# EAGLE board PCB (EAGLE 9.7.0)
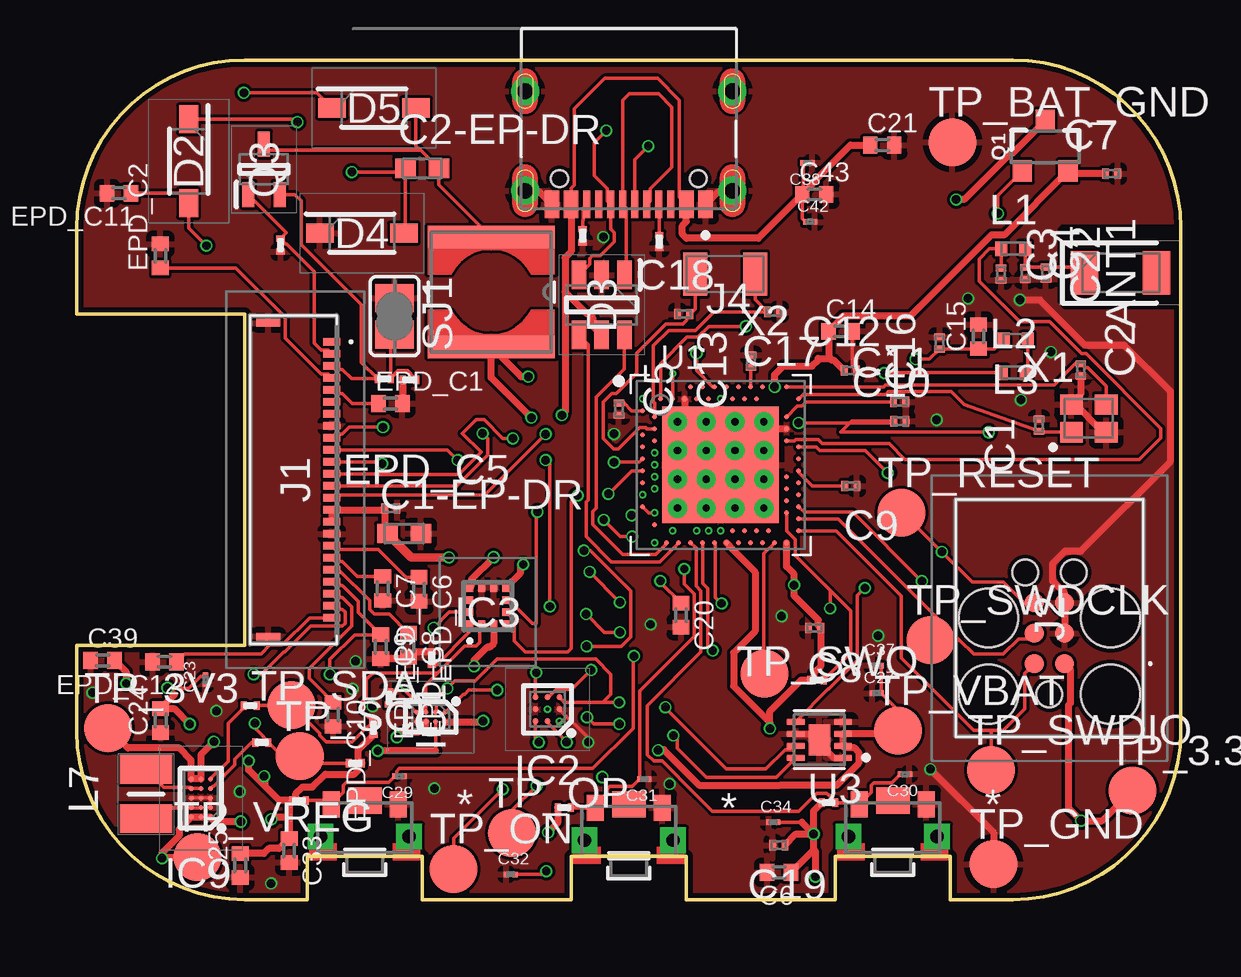
[diagram p0: board, top side]
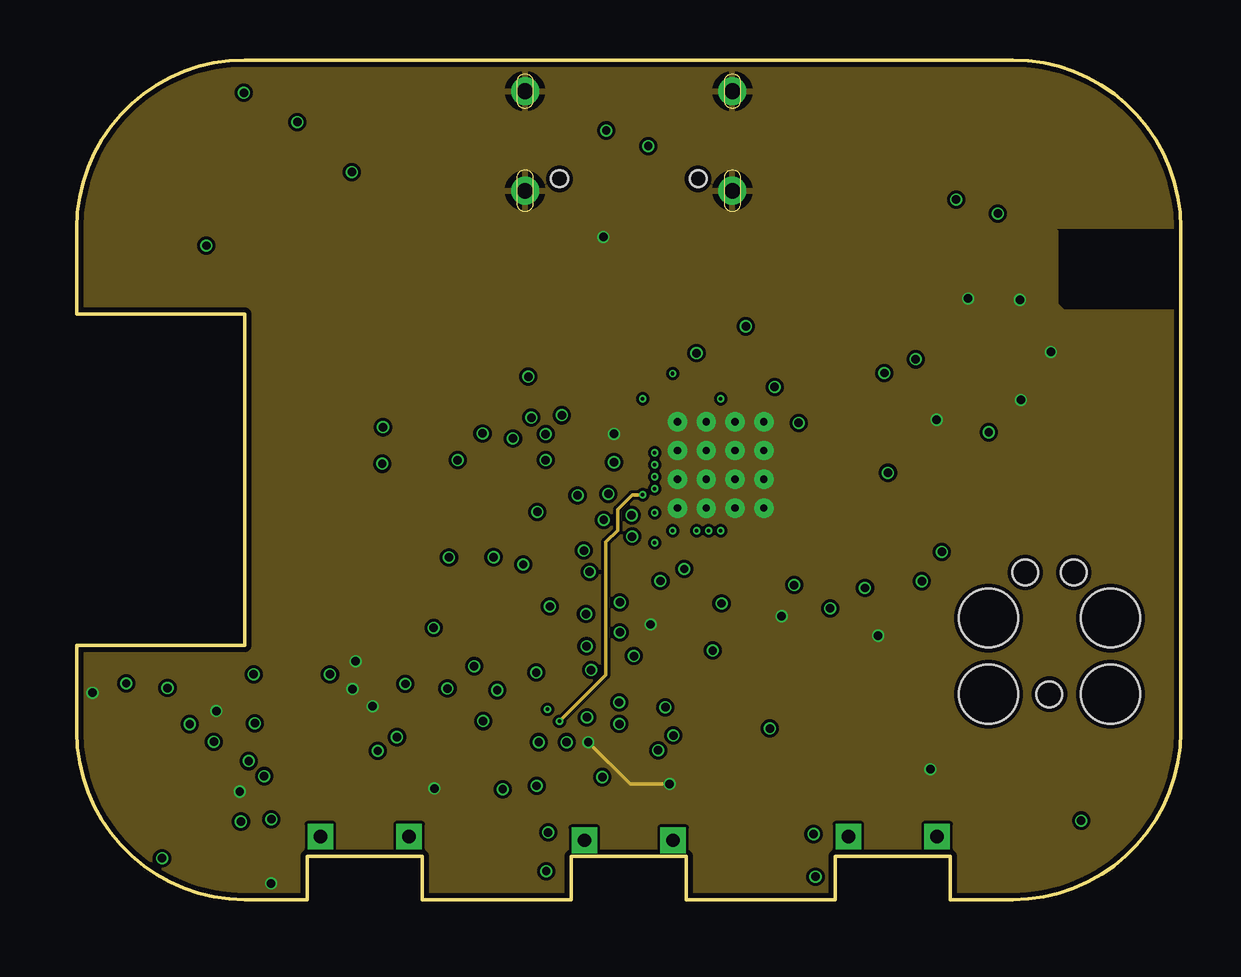
[diagram p1: board, inner layer Route2]
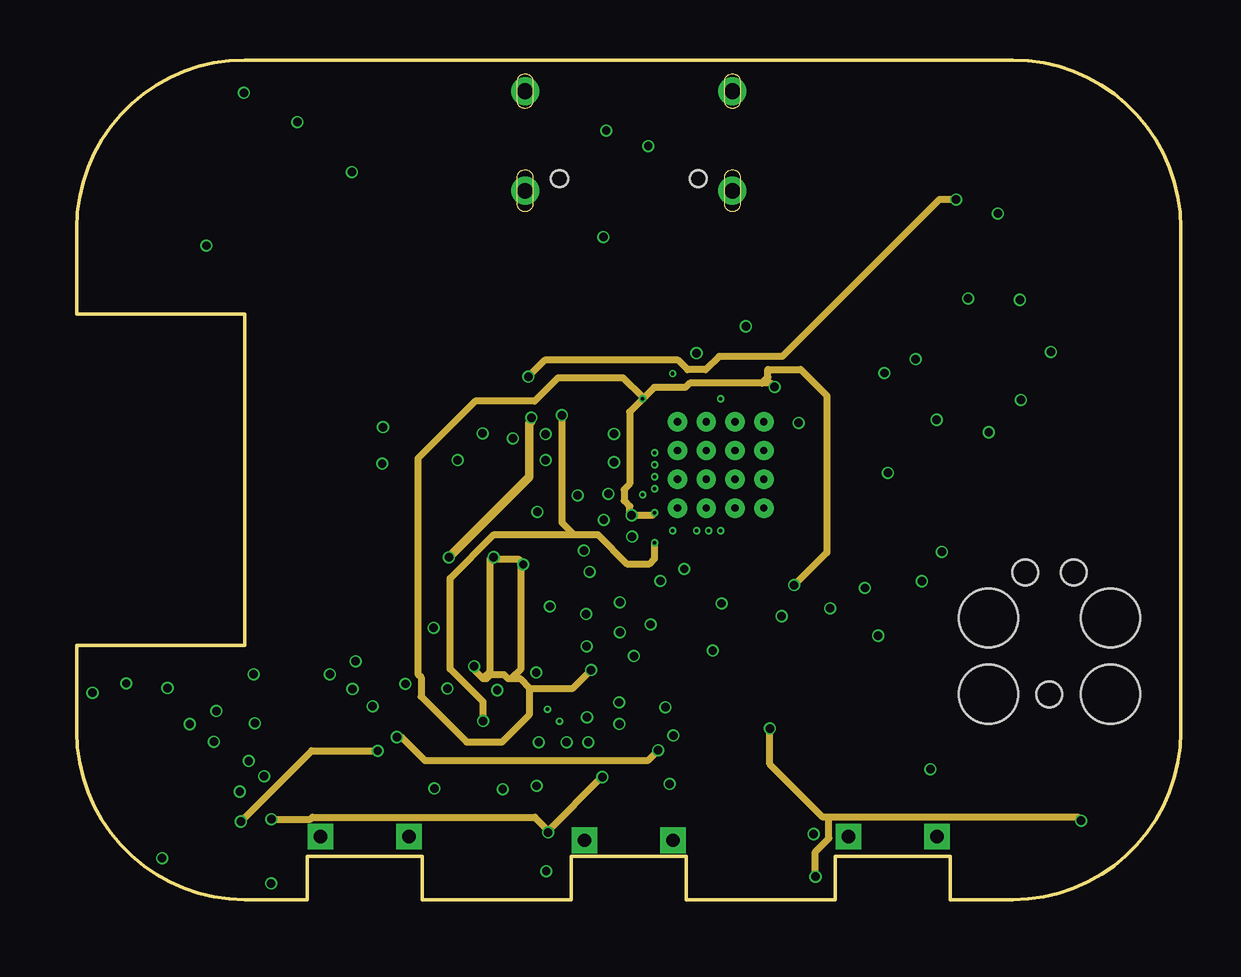
[diagram p2: board, inner layer Route15]
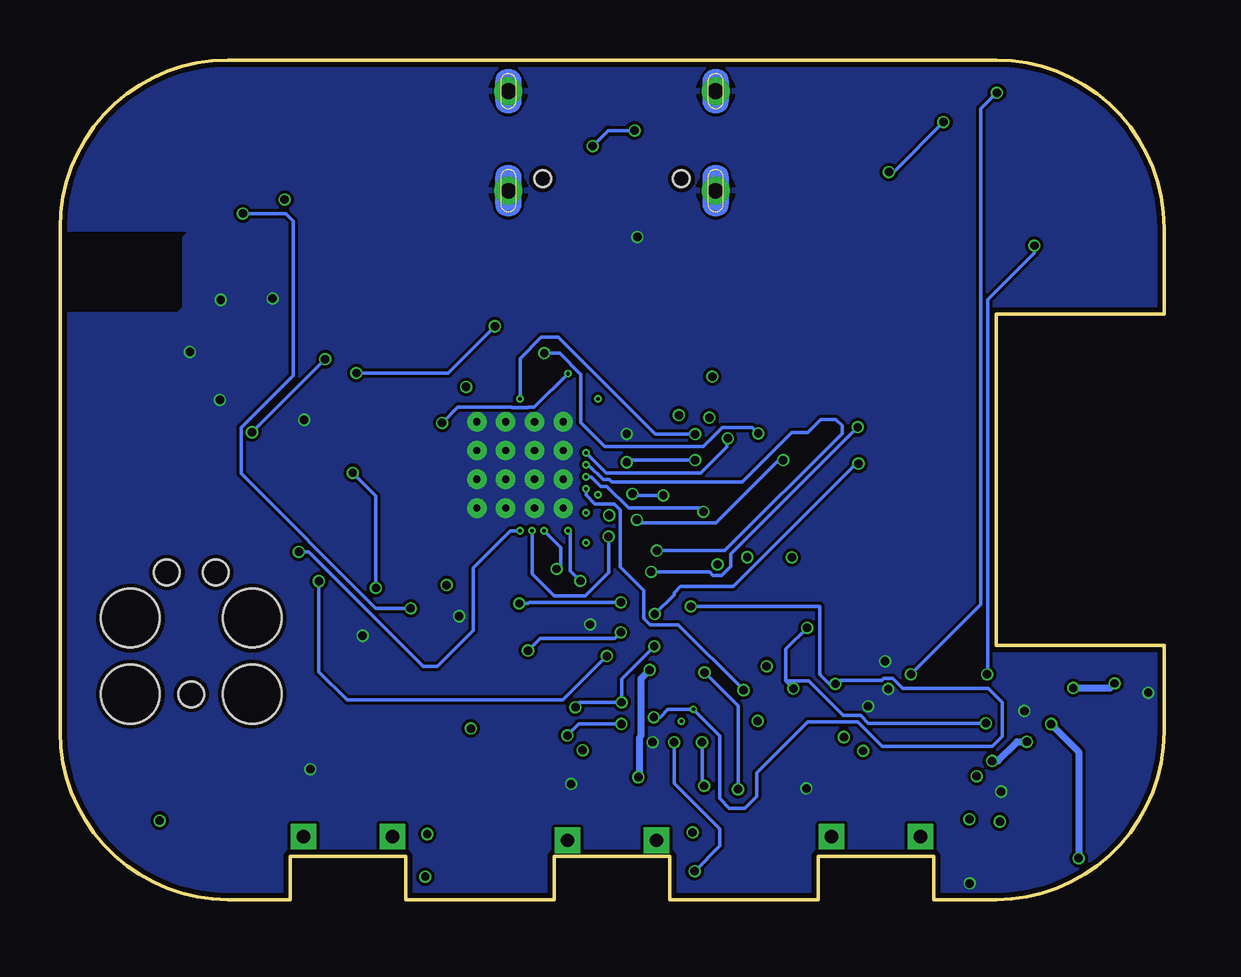
[diagram p3: board, bottom side, seen from below]

Size 46 x 35 mm. Coordinates in mm from the lower left corner, seen from the top.
Outline: 7,35 39,35 arc-90 46,28 46,7 arc-90 39,0 36.4,0 36.4,1.8 31.6,1.8 31.6,0 25.4,0 25.4,1.8 20.6,1.8 20.6,0 14.4,0 14.4,1.8 9.6,1.8 9.6,0 7,0 arc-90 0,7 0,10.6 7,10.6 7,24.4 0,24.4 0,28 arc-90 7,35
Copper layers (1+2*15+16): Top 0.035mm / dielectric 1.6mm / Route2 0.035mm / dielectric 0.15mm / Route15 0.035mm / dielectric 0.2mm / Bottom 0.035mm
Design rules "jlcpcb-2layers.dru *": minimum track width 5mil, minimum drill 0.3mm, track to track 5mil, track to pad 5mil, pad to pad 5mil, via to via 5mil, smd to smd 5mil, copper to edge 0.2mm, drill to drill 6mil, minimum pad ring 10mil, minimum via ring 3mil, stop-mask expansion 4mil, vias tented up to drill 0mil, thermal gap 10mil

## Footprints (pad centres in the part's own frame; a part is rotated, then mirrored left to right if it is on the bottom)
2450AT18B100E_ANTC3216X140N = smd 1.15 x 1.8: 1 -1.5,0; 2 1.5,0
NORDIC_NRF_3_RESC0201_L = smd 0.28 x 0.43: 1 -0.255,0; 2 0.255,0
NORDIC_NRF_3_RESC0603_L = smd 0.85 x 0.8: 1 -0.7,0; 2 0.7,0
PERFECT_0402_0402 = smd 0.6 x 0.7: 1 -0.5,0; 2 0.5,0
GRM011R60J152KE01L_2_CAPC0201X13N = smd 0.22 x 0.23: 1 -0.185,0; 2 0.185,0
ESP32_C6_LIBRARY_5_SOD3716X135N = smd 1.15 x 0.8: 1 -1.75,0; 2 1.75,0
ESP32_C6_LIBRARY_3_SOT95P280X145-6N = smd 1.2 x 0.6: 1 -1.25,0.95; 2 -1.25,0; 3 -1.25,-0.95; 4 1.25,-0.95; 5 1.25,0; 6 1.25,0.95
BQ25180YBGR_BGA8C40P2X4_100X155X50 = smd 0.2 x 0.2: A1 -0.2,0.6; A2 0.2,0.6; B1 -0.2,0.2; B2 0.2,0.2; C1 -0.2,-0.2; C2 0.2,-0.2; D1 -0.2,-0.6; D2 0.2,-0.6
DRV2605YZFR_BGA9C50P3X3_144X144X62 = smd 0.25 x 0.25: A1 -0.5,0.5; A2 0,0.5; A3 0.5,0.5; B1 -0.5,0; B2 0,0; B3 0.5,0; C1 -0.5,-0.5; C2 0,-0.5; C3 0.5,-0.5
BMA423_BMA423 = smd 0.3 x 0.35: 1 -0.75,-0.775; 2 -0.25,-0.775; 3 0.25,-0.775; 4 0.75,-0.775; 7 0.75,0.775; 8 0.25,0.775; 9 -0.25,0.775; 10 -0.75,0.775 | smd 0.35 x 0.3: 5 0.775,-0.25; 6 0.775,0.25; 11 -0.775,0.25; 12 -0.775,-0.25
RT6160AWSC_BGA15C40P3X5_140X230X60 = smd 0.216 x 0.216: A1 -0.4,0.8; A2 0,0.8; A3 0.4,0.8; B1 -0.4,0.4; B2 0,0.4; B3 0.4,0.4; C1 -0.4,0; C2 0,0; C3 0.4,0; D1 -0.4,-0.4; D2 0,-0.4; D3 0.4,-0.4; E1 -0.4,-0.8; E2 0,-0.8; E3 0.4,-0.8
503480-2400_5034802400 = smd 0.3 x 0.7: 1 -5.75,1.525; 2 -5.25,1.525; 3 -4.75,1.525; 4 -4.25,1.525; 5 -3.75,1.525; 6 -3.25,1.525; 7 -2.75,1.525; 8 -2.25,1.525; 9 -1.75,1.525; 10 -1.25,1.525; 11 -0.75,1.525; 12 -0.25,1.525; 13 0.25,1.525; 14 0.75,1.525; 15 1.25,1.525; 16 1.75,1.525; 17 2.25,1.525; 18 2.75,1.525; 19 3.25,1.525; 20 3.75,1.525; 21 4.25,1.525; 22 4.75,1.525; 23 5.25,1.525; 24 5.75,1.525 | smd 0.3 x 1: MP1 -6.54,-1.125; MP2 6.54,-1.125
TC2030-IDC_TC2030IDC = smd 0.783 x 0.783: 1 -0.953,-0.635; 2 -0.953,0.635; 3 0.317,-0.635; 4 0.317,0.635; 5 1.588,-0.635; 6 1.588,0.635 | hole 2.451: -2.223,-2.54; -2.223,2.54; 0.952,-2.54; 0.952,2.54 | hole 1.067: -2.223,0; 2.857,-1.016; 2.857,1.016
KH-TYPE-C-16P_KINGHELM_KH-TYPE-C-16P = smd 0.6 x 1.15: A1_B12 -3.2,4.725; A4_B9 -2.4,4.725; A9_B4 2.4,4.725; A12_B1 3.2,4.725 | smd 0.3 x 1.15: A5 -1.25,4.725; A6 -0.25,4.725; A7 0.25,4.725; A8 1.25,4.725; B5 1.75,4.725; B6 0.75,4.725; B7 -0.75,4.725; B8 -1.75,4.725 | drill 0.65 pad 1.05: SH1 -4.32,0; SH2 4.32,0; SH3 -4.32,4.15; SH4 4.32,4.15 | hole 0.7: -2.89,3.65; 2.89,3.65
NORDIC_NRF_2_RESC0402_L = smd 0.5 x 0.6: 1 -0.5,0; 2 0.5,0
ESP32_C6_LIBRARY_2_IND_4828-WE-TPC_WRE = smd 0.9 x 5.3: 1 -2.286,0; 2 2.286,0
MLP2016SR47MT0S1_INDC2016X100N = smd 1.2 x 2.2: 1 -1.028,0; 2 1.028,0
ESP32_C6_LIBRARY_4_ESP32_C6_LIBRARY_4_ESP32_C6_LIBRARY_4_ESP32_C6_LIBRARY_4_ESP32_WROVER_SPARKFUN-DISCRETESEMI_SOT23-3 = smd 0.8 x 0.9: 1 -0.95,-1; 2 0.95,-1; 3 0,1.1
ESP32_C6_LIBRARY_6_SOT65P210X110-3N = smd 1.05 x 0.5: 1 -1.05,0.65; 2 -1.05,-0.65; 3 1.05,0
CPF0201D7K68C1_0201 = smd 0.35 x 0.25: 1 0,0.275; 2 0,-0.275
ESP32_C6_LIBRARY_7_JUMPER_SJ = smd 1.168 x 1.6: 1 -0.762,0; 2 0.762,0
2025-10-22_07-23-44_LIBRARY_SW_EVP-AKE31A_PAN = smd 0.711 x 1.092: 1 -1.4,-0.972; 2 1.4,-0.972 | drill 0.559 pad 0.914 square: 3 -1.848,0.381; 4 1.848,0.381 | smd 1.397 x 1.092: 5 0,-1.124
HECTOR_WATCH_1_TP20R = smd 2 x 2: TP 0,0
NORDIC_NRF_4_AQFN50P700X700X85_HS-74N = smd 4.85 x 4.85: P$74 0,0 | drill 0.3 pad 0.6: P$75 -1.8,1.8; P$76 -0.6,1.8; P$77 0.6,1.8; P$78 1.8,1.8; P$79 -1.8,0.6; P$80 -0.6,0.6; P$81 0.6,0.6; P$82 1.8,0.6; P$83 -1.8,-0.6; P$84 -0.6,-0.6; P$85 0.6,-0.6; P$86 1.8,-0.6; P$87 -1.8,-1.8; P$88 -0.6,-1.8; P$89 0.6,-1.8; P$90 1.8,-1.8 | smd 0.2 x 0.2: P$A8 -1.25,3.25; P$A10 -0.75,3.25; P$A12 -0.25,3.25; P$A14 0.25,3.25; P$A16 0.75,3.25; P$A18 1.25,3.25; P$A20 1.75,3.25; P$A22 2.25,3.25; P$A23 2.75,3.25; P$AA24 3.25,-2.25; P$AB2 -2.75,-2.5; P$AC5 -2,-2.75; P$AC9 -1,-2.75; P$AC11 -0.5,-2.75; P$AC13 0,-2.75; P$AC15 0.5,-2.75; P$AC17 1,-2.75; P$AC19 1.5,-2.75; P$AC21 2,-2.75; P$AC24 3.25,-2.75; P$AD2 -2.75,-3.25; P$AD4 -2.25,-3.25; P$AD6 -1.75,-3.25; P$AD8 -1.25,-3.25; P$AD10 -0.75,-3.25; P$AD12 -0.25,-3.25; P$AD14 0.25,-3.25; P$AD16 0.75,-3.25; P$AD18 1.25,-3.25; P$AD20 1.75,-3.25; P$AD22 2.25,-3.25; P$AD23 2.75,-3.25; P$B1 -3.25,2.75; P$B3 -2.5,2.75; P$B5 -2,2.75; P$B7 -1.5,2.75; P$B9 -1,2.75; P$B11 -0.5,2.75; P$B13 0,2.75; P$B15 0.5,2.75; P$B17 1,2.75; P$B19 1.5,2.75; P$B24 3.25,2.75; P$C1 -3.25,2.25; P$D2 -2.75,2; P$D23 2.75,2; P$E24 3.25,1.75; P$F2 -2.75,1.5; P$F23 2.75,1.5; P$G1 -3.25,1.25; P$H2 -2.75,1; P$H23 2.75,1; P$J1 -3.25,0.75; P$J24 3.25,0.75; P$K2 -2.75,0.5; P$L1 -3.25,0.25; P$L24 3.25,0.25; P$M2 -2.75,0; P$N1 -3.25,-0.25; P$N24 3.25,-0.25; P$P2 -2.75,-0.5; P$P23 2.75,-0.5; P$R1 -3.25,-0.75; P$R24 3.25,-0.75; P$T2 -2.75,-1; P$T23 2.75,-1; P$U1 -3.25,-1.25; P$U24 3.25,-1.25; P$V23 2.75,-1.5; P$W1 -3.25,-1.75; P$W24 3.25,-1.75; P$Y2 -2.75,-2; P$Y23 2.75,-2
ESP32_C6_LIBRARY_SON50P200X200X80-9N = smd 0.76 x 0.27: 1 -0.985,0.75; 2 -0.985,0.25; 3 -0.985,-0.25; 4 -0.985,-0.75; 5 0.985,-0.75; 6 0.985,-0.25; 7 0.985,0.25; 8 0.985,0.75 | smd 0.9 x 1.3: 9 0,0
NORDIC_NRF_BT-XTAL_2016_N = smd 0.95 x 0.85: 1 -0.725,-0.575; 2 0.725,-0.575; 3 0.725,0.575; 4 -0.725,0.575
NORDIC_NRF_1_XTAL_3215_N = smd 1 x 1.8: 1 -1.25,0; 2 1.25,0

## Placement (x,y rotation side)
ANT1  2450AT18B100E  [2450AT18B100E_ANTC3216X140N]  43.49,26.12 0 top
C1  12pF  [NORDIC_NRF_3_RESC0201_L]  40.09,19.78 90 top
C1-EP-DR  10uF  [NORDIC_NRF_3_RESC0603_L]  13.64,15.26 0 top
C2  12pF  [NORDIC_NRF_3_RESC0201_L]  41.83,22.08 270 top
C2-EP-DR  4.7uF/25V  [NORDIC_NRF_3_RESC0603_L]  14.39,30.48 0 top
C3  1pF  [NORDIC_NRF_3_RESC0201_L]  38.51,26.07 270 top
C4  1pF  [NORDIC_NRF_3_RESC0201_L]  39.52,26.1 270 top
C5  100nF  [NORDIC_NRF_3_RESC0201_L]  22.59,20.44 270 top
C6  4.7µF  [PERFECT_0402_0402]  29.26,1.13 180 top
C7  100nF  [NORDIC_NRF_3_RESC0201_L]  43.12,30.26 0 top
C8  100nF  [NORDIC_NRF_3_RESC0201_L]  30.74,11.32 180 top
C9  820pF  [NORDIC_NRF_3_RESC0201_L]  32.25,17.24 180 top
C10  N.C  [NORDIC_NRF_3_RESC0201_L]  34.3,19.94 0 top
C11  100pF  [NORDIC_NRF_3_RESC0201_L]  34.29,20.75 0 top
C12  100nF  [NORDIC_NRF_3_RESC0201_L]  32.23,22.05 0 top
C13  N.C  [NORDIC_NRF_3_RESC0201_L]  28.09,22.44 90 top
C14  4.7µF  [PERFECT_0402_0402]  31.83,23.69 0 top
C15  1.0µF  [PERFECT_0402_0402]  37.57,23.47 90 top
C16  47nF  [NORDIC_NRF_3_RESC0201_L]  35.95,23.2 90 top
C17  12pF  [NORDIC_NRF_3_RESC0201_L]  29.03,24.5 180 top
C18  12pF  [NORDIC_NRF_3_RESC0201_L]  25.29,24.41 0 top
C19  100nF  [NORDIC_NRF_3_RESC0201_L]  29.25,2.27 180 top
C20  4.7µF  [PERFECT_0402_0402]  25.18,11.86 270 top
C21  4.7µF  [PERFECT_0402_0402]  33.56,31.45 0 top
C22  N.C  [NORDIC_NRF_3_RESC0201_L]  40.38,26.11 270 top
C23  0.1uF  [GRM011R60J152KE01L_2_CAPC0201X13N]  5.36,9.17 90 top
C24  10uF  [PERFECT_0402_0402]  3.49,7.46 90 top
C25  22uF  [PERFECT_0402_0402]  6.81,1.42 90 top
C27  0.1uF  [GRM011R60J152KE01L_2_CAPC0201X13N]  33.33,8.6 0 top
C29  1uF  [GRM011R60J152KE01L_2_CAPC0201X13N]  13.45,5.15 180 top
C30  1uF  [GRM011R60J152KE01L_2_CAPC0201X13N]  34.51,5.23 180 top
C31  1uF  [GRM011R60J152KE01L_2_CAPC0201X13N]  23.64,5.03 180 top
C32  1uF  [GRM011R60J152KE01L_2_CAPC0201X13N]  18.08,1.05 0 top
C33  22uF  [PERFECT_0402_0402]  8.85,2.05 270 top
C34  0.1uF  [GRM011R60J152KE01L_2_CAPC0201X13N]  29.02,3.22 0 top
C37  1uF  [GRM011R60J152KE01L_2_CAPC0201X13N]  33.33,9.76 0 top
C38  1uF  [GRM011R60J152KE01L_2_CAPC0201X13N]  30.45,30.71 180 top
C39  10uF  [PERFECT_0402_0402]  1.08,9.97 0 top
C42  0.1uF  [GRM011R60J152KE01L_2_CAPC0201X13N]  30.56,28.25 0 top
C43  4.7uF  [PERFECT_0402_0402]  30.73,29.4 0 top
D2  MBR0530  [ESP32_C6_LIBRARY_5_SOD3716X135N]  4.66,30.78 270 top
D3  USBLC6-2SC6Y  [ESP32_C6_LIBRARY_3_SOT95P280X145-6N]  21.87,24.79 270 top
D4  MBR0530  [ESP32_C6_LIBRARY_5_SOD3716X135N]  11.88,27.78 0 top
D5  MBR0530  [ESP32_C6_LIBRARY_5_SOD3716X135N]  12.38,33 0 top
EPD_C1  1uF/50V  [PERFECT_0402_0402]  13.07,20.68 0 top
EPD_C2  1uF/50V  [PERFECT_0402_0402]  3.48,26.83 90 top
EPD_C5  0.1uF/50V  [NORDIC_NRF_3_RESC0201_L]  13.09,16.3 0 top
EPD_C6  1uF/50V  [PERFECT_0402_0402]  14.26,12.93 270 top
EPD_C7  1uF/50V  [PERFECT_0402_0402]  12.75,12.97 270 top
EPD_C8  1uF/50V  [PERFECT_0402_0402]  13.82,10.6 270 top
EPD_C9  1uF/50V  [PERFECT_0402_0402]  12.67,10.54 270 top
EPD_C10  1uF/50V  [PERFECT_0402_0402]  10.68,7.72 270 top
EPD_C11  1uF/50V  [PERFECT_0402_0402]  1.76,29.44 180 top
EPD_C12  1uF/50V  [PERFECT_0402_0402]  3.66,9.91 180 top
IC1  BQ25180YBGR  [BQ25180YBGR_BGA8C40P2X4_100X155X50]  14.75,7.61 270 top
IC2  DRV2605YZFR  [DRV2605YZFR_BGA9C50P3X3_144X144X62]  19.61,7.93 180 top
IC3  BMA421  [BMA423_BMA423]  17.13,12.23 0 top
IC9  RT6160AWSC  [RT6160AWSC_BGA15C40P3X5_140X230X60]  5.17,4.23 180 top
J1  503480-2400  [503480-2400_5034802400]  9.1,17.5 270 top
J2  TC2030-IDC  [TC2030-IDC_TC2030IDC]  40.53,10.78 90 top
J4  KH-TYPE-C-16P  [KH-TYPE-C-16P_KINGHELM_KH-TYPE-C-16P]  23,33.7 180 top
L1  3.9nH  [NORDIC_NRF_2_RESC0402_L]  39.02,27.13 0 top
L2  10µH  [NORDIC_NRF_2_RESC0402_L]  39.04,21.96 0 top
L3  15nH  [NORDIC_NRF_2_RESC0402_L]  39.12,23.33 180 top
L5  68uH  [ESP32_C6_LIBRARY_2_IND_4828-WE-TPC_WRE]  17.27,25.33 270 top
L7  FTC252012SR47MBCA  [MLP2016SR47MT0S1_INDC2016X100N]  2.88,4.4 90 top
Q1  20V/4.2A/52mΩ/1.4W  [ESP32_C6_LIBRARY_4_ESP32_C6_LIBRARY_4_ESP32_C6_LIBRARY_4_ESP32_C6_LIBRARY_4_ESP32_WROVER_SPARKFUN-DISCRETESEMI_SOT23-3]  40.35,31.37 0 top
Q3  SI1308EDL-T1-GE3  [ESP32_C6_LIBRARY_6_SOT65P210X110-3N]  7.8,30.44 90 top
R1_EP_DR  0.47  [CPF0201D7K68C1_0201]  12.81,21.71 270 top
R1_USB  5K1  [CPF0201D7K68C1_0201]  24.27,27.43 180 top
R2  0  [CPF0201D7K68C1_0201]  7.23,8.09 270 top
R2_EP_DR  10K  [CPF0201D7K68C1_0201]  8.49,27.28 180 top
R2_USB  5K1  [CPF0201D7K68C1_0201]  21.08,27.67 0 top
R3  0  [CPF0201D7K68C1_0201]  14.79,10.06 0 top
R4  0  [CPF0201D7K68C1_0201]  7.71,6.55 270 top
R5  10K  [CPF0201D7K68C1_0201]  31.32,4.04 270 top
R7  10K  [CPF0201D7K68C1_0201]  9.26,4.13 270 top
R8  10K  [CPF0201D7K68C1_0201]  20.31,3.84 270 top
R9  10K  [CPF0201D7K68C1_0201]  13.01,8.41 0 top
R17  3K3  [CPF0201D7K68C1_0201]  11.6,5.68 270 top
R18  3K3  [CPF0201D7K68C1_0201]  12.37,7.15 180 top
R_PWR_EPD  10K  [CPF0201D7K68C1_0201]  30.84,9.15 270 top
R_TYPE_SEL  2.2  [CPF0201D7K68C1_0201]  13.86,21.67 90 top
SJ1  [ESP32_C6_LIBRARY_7_JUMPER_SJ]  13.24,24.32 270 top
SW_DN  2025-10-22_07-23-44_LIBRARY_EVP-AKE31ASW_EVP-AKE31A_PAN  [2025-10-22_07-23-44_LIBRARY_SW_EVP-AKE31A_PAN]  12,3 180 top
SW_ENT  2025-10-22_07-23-44_LIBRARY_EVP-AKE31ASW_EVP-AKE31A_PAN  [2025-10-22_07-23-44_LIBRARY_SW_EVP-AKE31A_PAN]  23,2.85 180 top
SW_UP  2025-10-22_07-23-44_LIBRARY_EVP-AKE31ASW_EVP-AKE31A_PAN  [2025-10-22_07-23-44_LIBRARY_SW_EVP-AKE31A_PAN]  34,3 180 top
TP_3.3V  HECTOR_WATCH_1_TPTP20R  [HECTOR_WATCH_1_TP20R]  43.98,4.54 0 top
TP_3V3  HECTOR_WATCH_1_TPTP20R  [HECTOR_WATCH_1_TP20R]  1.3,7.14 0 top
TP_BAT_GND  HECTOR_WATCH_1_TPTP20R  [HECTOR_WATCH_1_TP20R]  36.48,31.57 0 top
TP_GND  HECTOR_WATCH_1_TPTP20R  [HECTOR_WATCH_1_TP20R]  38.2,1.47 0 top
TP_ON  HECTOR_WATCH_1_TPTP20R  [HECTOR_WATCH_1_TP20R]  15.7,1.28 0 top
TP_OP  HECTOR_WATCH_1_TPTP20R  [HECTOR_WATCH_1_TP20R]  18.13,2.77 0 top
TP_RESET  HECTOR_WATCH_1_TPTP20R  [HECTOR_WATCH_1_TP20R]  34.36,16.12 0 top
TP_SCL  HECTOR_WATCH_1_TPTP20R  [HECTOR_WATCH_1_TP20R]  9.29,5.97 0 top
TP_SDA  HECTOR_WATCH_1_TPTP20R  [HECTOR_WATCH_1_TP20R]  8.95,8.1 0 top
TP_SWDCLK  HECTOR_WATCH_1_TPTP20R  [HECTOR_WATCH_1_TP20R]  35.56,10.81 0 top
TP_SWDIO  HECTOR_WATCH_1_TPTP20R  [HECTOR_WATCH_1_TP20R]  38.1,5.39 0 top
TP_SWO  HECTOR_WATCH_1_TPTP20R  [HECTOR_WATCH_1_TP20R]  28.65,9.42 0 top
TP_VBAT  HECTOR_WATCH_1_TPTP20R  [HECTOR_WATCH_1_TP20R]  34.22,7.04 0 top
TP_VREG  HECTOR_WATCH_1_TPTP20R  [HECTOR_WATCH_1_TP20R]  5.04,1.76 0 top
U1  NRF52840_QF  [NORDIC_NRF_4_AQFN50P700X700X85_HS-74N]  26.83,18.12 0 top
U3  MAX17048G+T10  [ESP32_C6_LIBRARY_SON50P200X200X80-9N]  30.94,6.66 180 top
X1  32MHz  [NORDIC_NRF_BT-XTAL_2016_N]  42.17,20.06 0 top
X2  32.768kHz  [NORDIC_NRF_1_XTAL_3215_N]  27.01,26.07 180 top

## Library data of the parts
ANT1 = proiect; ARROW_PART_NUMBER: 2450AT18B100E; ARROW_PRICE-STOCK: https://www.arrow.com/en/products/2450at18b100e/johanson-dielectrics?utm_currency=USD&region=nac; DESCRIPTION: Antennas 2.45GHz ANTENNA; HEIGHT: 1.4mm; MANUFACTURER_NAME: JOHANSON TECHNOLOGY; MANUFACTURER_PART_NUMBER: 2450AT18B100E; MOUSER_PART_NUMBER: 609-2450AT18B100E; MOUSER_PRICE-STOCK: https://www.mouser.co.uk/ProductDetail/Johanson-Technology/2450AT18B100E?qs=yCnrNFeXz%252Bh5MFsFIXGZGA%3D%3D
C1 C1-EP-DR C2 C2-EP-DR C3-C22 C24 C25 C33 C39 C43 EPD_C1 EPD_C2 EPD_C5-EPD_C12 L1-L3 R1_EP_DR R1_USB R2 R2_EP_DR R2_USB R3-R5 R7-R9 R17 R18 R_PWR_EPD R_TYPE_SEL SJ1 TP_3.3V TP_3V3 TP_BAT_GND TP_GND TP_ON TP_OP TP_RESET TP_SCL TP_SDA TP_SWDCLK TP_SWDIO TP_SWO TP_VBAT TP_VREG U1 X1 X2 = proiect
C23 C27 C29-C32 C34 C37 C38 C42 = proiect; AVAILABILITY: In Stock; CHECK_PRICES: https://www.snapeda.com/parts/GRM011R60J152KE01L/Murata/view-part/?ref=eda; DESCRIPTION: SMD Capacitor X5R(EIA) with Capacitance: 1500pF Tol. 10%. Rated Voltage: 6.3Vdc; MF: Murata; MP: GRM011R60J152KE01L; PACKAGE: 0201 Murata; PRICE: None; SNAPEDA_LINK: https://www.snapeda.com/parts/GRM011R60J152KE01L/Murata/view-part/?ref=snap
D2 D4 D5 = proiect; AVAILABILITY: In Stock; CHECK_PRICES: https://www.snapeda.com/parts/MBR0530/Onsemi/view-part/?ref=eda; DESCRIPTION: Diode Schottky 30 V 500mA Surface Mount SOD-123; MF: ON Semiconductor; MP: MBR0530; PACKAGE: SOD-123-2 ON Semiconductor; PRICE: None; PURCHASE-URL: https://www.snapeda.com/api/url_track_click_mouser/?unipart_id=179458&manufacturer=ON Semiconductor&part_name=MBR0530&search_term=None; SNAPEDA_LINK: https://www.snapeda.com/parts/MBR0530/Onsemi/view-part/?ref=snap
D3 = proiect; AVAILABILITY: In Stock; CHECK_PRICES: https://www.snapeda.com/parts/USBLC6-2SC6Y/STMicroelectronics/view-part/?ref=eda; DESCRIPTION: 17V Clamp 5A (8/20µs) Ipp Tvs Diode Surface Mount SOT-23-6; MF: STMicroelectronics; MP: USBLC6-2SC6Y; PACKAGE: SOT-23-6 STMicroelectronics; PRICE: None; SNAPEDA_LINK: https://www.snapeda.com/parts/USBLC6-2SC6Y/STMicroelectronics/view-part/?ref=snap
IC1 = proiect; ARROW_PART_NUMBER: BQ25180YBGR; ARROW_PRICE-STOCK: https://www.arrow.com/en/products/bq25180ybgr/texas-instruments?utm_currency=USD&region=nac; DESCRIPTION: Charger IC Lithium Ion/Polymer, Lithium Iron Phosphate 8-DSBGA (1.6x1.1); HEIGHT: 0.5mm; MANUFACTURER_NAME: Texas Instruments; MANUFACTURER_PART_NUMBER: BQ25180YBGR; MOUSER_PART_NUMBER: 595-BQ25180YBGR; MOUSER_PRICE-STOCK: https://www.mouser.co.uk/ProductDetail/Texas-Instruments/BQ25180YBGR?qs=doiCPypUmgEWjAK%252BJAX6Tw%3D%3D
IC2 = proiect; ARROW_PART_NUMBER: DRV2605YZFR; ARROW_PRICE-STOCK: https://www.arrow.com/en/products/drv2605yzfr/texas-instruments?region=nac; DESCRIPTION: Haptic Driver for ERM/LRA with Built-In Library and Smart Loop Architecture; HEIGHT: 0.625mm; MANUFACTURER_NAME: Texas Instruments; MANUFACTURER_PART_NUMBER: DRV2605YZFR
IC3 = proiect; ARROW_PART_NUMBER: BMA423; ARROW_PRICE-STOCK: https://www.arrow.com/en/products/bma423/bosch; DESCRIPTION: Accelerometers Triaxial low-g 12bit Acceleration Sensor; HEIGHT: 1mm; MANUFACTURER_NAME: BOSCH; MANUFACTURER_PART_NUMBER: BMA423; MOUSER_PART_NUMBER: 262-BMA423; MOUSER_PRICE-STOCK: https://www.mouser.co.uk/ProductDetail/Bosch-Sensortec/BMA423?qs=HXFqYaX1Q2xC%252BSgeGoX3mg%3D%3D
IC9 = proiect; DESCRIPTION: Buck-Boost Regulator Positive Output Step-Up/Step-Down I2C DC-DC Controller IC 15-WL-CSP (BSC) (1.4x2.3); HEIGHT: 0.6mm; MANUFACTURER_NAME: RICHTEK; MANUFACTURER_PART_NUMBER: RT6160AWSC; MOUSER_PART_NUMBER: 835-RT6160AWSC; MOUSER_PRICE-STOCK: https://www.mouser.co.uk/ProductDetail/Richtek/RT6160AWSC?qs=amGC7iS6iy%2FLd9PSoixZXQ%3D%3D
J1 = proiect; DESCRIPTION: FFC & FPC Connectors 0.5mm FPC RA SMT Dual Contact 24Ckt; HEIGHT: 1.87mm; MANUFACTURER_NAME: Molex; MANUFACTURER_PART_NUMBER: 503480-2400; MOUSER_PART_NUMBER: 538-503480-2400; MOUSER_PRICE-STOCK: https://www.mouser.co.uk/ProductDetail/Molex/503480-2400?qs=OAhjpuo3Vu7efIoxFh9AOw%3D%3D
J2 = proiect; DESCRIPTION: CABLE ADAPTER 6 POS; HEIGHT: 19mm; MANUFACTURER_NAME: Tag Connect; MANUFACTURER_PART_NUMBER: TC2030-IDC
J4 = proiect; AVAILABILITY: Not in stock; CHECK_PRICES: https://www.snapeda.com/parts/KH-TYPE-C-16P/Kinghelm/view-part/?ref=eda; MF: kinghelm; MP: KH-TYPE-C-16P; PACKAGE: None; PRICE: None; SNAPEDA_LINK: https://www.snapeda.com/parts/KH-TYPE-C-16P/Kinghelm/view-part/?ref=snap
L5 = proiect; COPYRIGHT: Copyright (C) 2024 Ultra Librarian. All rights reserved.; MANUFACTURER_PART_NUMBER: 744043680; MFR_NAME: Wurth Electronics
L7 = proiect; DESCRIPTION: SMD / SMT Inductors (Coils), L=0.47?H, L x W x T :; HEIGHT: 1mm; JLCPCB: https://jlcpcb.com/partdetail/6763488-FTC252012SR47MBCA/C5832368; MANUFACTURER_NAME: TDK; MANUFACTURER_PART_NUMBER: FTC252012SR47MBCA
Q1 = proiect; PROD_ID: TRAN-14388
Q3 = proiect; AVAILABILITY: In Stock; CHECK_PRICES: https://www.snapeda.com/parts/SI1308EDL-T1-GE3/Vishay+Siliconix/view-part/?ref=eda; DESCRIPTION: Si1308EDL-T1-GE3 N-channel MOSFET Transistor, 1.5 A, 30 V, 3-Pin SC-70 | Siliconix / Vishay SI1308EDL-T1-GE3; MF: Vishay Siliconix; MP: SI1308EDL-T1-GE3; PACKAGE: SOT-323 Vishay Semiconductor; PRICE: None; PURCHASE-URL: https://www.snapeda.com/api/url_track_click_mouser/?unipart_id=274603&manufacturer=Vishay Siliconix&part_name=SI1308EDL-T1-GE3&search_term=None; SNAPEDA_LINK: https://www.snapeda.com/parts/SI1308EDL-T1-GE3/Vishay+Siliconix/view-part/?ref=snap
SW_DN SW_ENT SW_UP = proiect; COPYRIGHT: Copyright (C) 2025 Ultra Librarian. All rights reserved.; DIGI-KEY_PART_NUMBER_1: P123437TR-ND; DIGI-KEY_PART_NUMBER_2: P123437CT-ND; DIGI-KEY_PART_NUMBER_3: P123437DKR-ND; MANUFACTURER_NAME: Panasonic; MANUFACTURER_PART_NUMBER: EVP-AKE31A
U3 = proiect; AVAILABILITY: In Stock; CHECK_PRICES: https://www.snapeda.com/parts/MAX17048G+T10/Analog+Devices/view-part/?ref=eda; DESCRIPTION: 3µA 1-Cell/2-Cell Fuel Gauge with ModelGauge; MF: Analog Devices; MP: MAX17048G+T10; PACKAGE: TDFN-8 Maxim; PRICE: None; PURCHASE-URL: https://www.snapeda.com/api/url_track_click_mouser/?unipart_id=329239&manufacturer=Analog Devices&part_name=MAX17048G+T10&search_term=None; SNAPEDA_LINK: https://www.snapeda.com/parts/MAX17048G+T10/Analog+Devices/view-part/?ref=snap

## Nets
3V3: C6.1 C7.1 C8.1 C12.1 C14.1 C19.1 C25.2 C33.1 C34.2 IC2.C2 IC3.3 IC3.7 IC3.10 IC9.E2 IC9.E3 J2.1 Q1.2 R5.2 R7.2 R8.2 R17.1 R18.1 R_PWR_EPD.2 TP_3.3V.TP TP_3V3.TP U1.P$A22 U1.P$AD14 U1.P$AD23 U1.P$B1 U1.P$W1 U1.P$Y2
ALERT: U1.P$J24 U3.5
D+: D3.4 U1.P$AD6
D-: D3.6 U1.P$AD4
DN: D3.1 J4.A7 J4.B7
DP: D3.3 J4.A6 J4.B6
EPD_3V3: C1-EP-DR.1 EPD_C5.1 J1.15 J1.16 L5.2 Q1.3
EPD_BUSY: J1.9 U1.P$AD12
EPD_CS: J1.12 U1.P$K2
EPD_DC: J1.11 U1.P$AD10
EPD_RST: J1.10 U1.P$AC11
GDR: J1.2 Q3.1 R2_EP_DR.2
GND: C1-EP-DR.2 C1.2 C2.2 C3.2 C4.2 C5.2 C6.2 C7.2 C8.2 C9.1 C10.2 C11.2 C12.2 C13.2 C14.2 C15.2 C16.2 C17.1 C18.1 C19.2 C20.2 C21.2 C22.2 C23.1 C24.1 C25.1 C27.1 C29.1 C30.1 C31.1 C32.1 C33.2 C34.1 C37.1 C38.1 C39.1 C42.2 C43.2 D3.2 D4.1 EPD_C1.2 EPD_C2.2 EPD_C5.2 EPD_C6.2 EPD_C7.2 EPD_C8.2 EPD_C9.2 EPD_C10.2 EPD_C11.2 EPD_C12.2 IC1.D2 IC2.B1 IC2.B3 IC3.8 IC3.9 IC9.B1 IC9.C1 IC9.C2 IC9.C3 J1.8 J1.17 J1.MP1 J1.MP2 J2.3 J2.5 J4.A1_B12 J4.A12_B1 J4.SH1 J4.SH2 J4.SH3 J4.SH4 R1_USB.1 R2_EP_DR.1 R2_USB.2 R3.1 R9.1 R_TYPE_SEL.1 SJ1.1 SW_DN.1 SW_ENT.1 SW_UP.1 TP_BAT_GND.TP TP_GND.TP U1.P$74 U1.P$75 U1.P$76 U1.P$77 U1.P$78 U1.P$79 U1.P$80 U1.P$81 U1.P$82 U1.P$83 U1.P$84 U1.P$85 U1.P$86 U1.P$87 U1.P$88 U1.P$89 U1.P$90 U1.P$B7 U1.P$F23 U3.1 U3.4 U3.6 U3.9 X1.2 X1.4
HAPTIC_EN: IC2.A1 U1.P$U1
IMU_INT1: IC3.5 U1.P$N1
IMU_INT2: IC3.6 U1.P$P2
LX1: IC9.B2 IC9.B3 L7.1
LX2: IC9.D2 IC9.D3 L7.2
MOSI: J1.14 U1.P$B13
N$1: IC1.D1 R9.2
N$3: IC3.1 R3.2
N$4: IC9.D1 R4.2
N$5: C9.2 U1.P$N24
N$6: IC9.E1 R2.2
N$7: EPD_C6.1 J1.18
N$8: C20.1 U1.P$AC5
N$9: C13.1 U1.P$A18
N$11: C11.1 U1.P$D23
N$12: L2.1 U1.P$B3
N$13: L2.2 L3.1
N$14: C10.1 C15.1 C16.1 L3.2 U1.P$B5 U1.P$E24
N$15: C2.1 U1.P$A23 X1.3
N$16: C1.1 U1.P$B24 X1.1
N$17: C3.1 L1.1 U1.P$H23
N$18: ANT1.1 C4.1 C22.1 L1.2
N$19: C2-EP-DR.2 D5.2 L5.1 Q3.3
N$20: C2-EP-DR.1 D2.1 D4.2
N$21: R1_EP_DR.1 R_TYPE_SEL.2 SJ1.2
N$22: J4.B5 R2_USB.1
N$23: C18.2 U1.P$F2 X2.2
N$24: C17.2 U1.P$D2 X2.1
N$25: EPD_C7.1 J1.19
N$26: C5.1 U1.P$C1
N$27: C32.2 IC2.A2
N$28: EPD_C2.1 J1.4
N$29: EPD_C1.1 J1.5
N$31: J4.A5 R1_USB.2
N$33: EPD_C8.1 J1.20
N$34: EPD_C10.1 J1.22
N$35: EPD_C12.1 J1.24
OUT+: IC2.A3 TP_OP.TP
OUT-: IC2.C3 TP_ON.TP
P0.04: U1.P$J1
P0.09: U1.P$L24
P0.13: C30.2 R5.1 SW_UP.2 U1.P$AD8
P0.14: C31.2 R8.1 SW_ENT.2 U1.P$AC9
P0.19: U1.P$AC15
P0.20: U1.P$AD16
P0.21: U1.P$AC17
P0.22: U1.P$AD18
P0.23: U1.P$AC19
P0.24: U1.P$AD20
P0.25: U1.P$AC21
P0.26: U1.P$G1
P0.27: U1.P$H2
P0.28: U1.P$B11
P0.29: U1.P$A10
P0.30: U1.P$B9
P0.31: U1.P$A8
P1.01: Q1.1 R_PWR_EPD.1 U1.P$Y23
P1.02: C29.2 R7.1 SW_DN.2 U1.P$W24
P1.03: U1.P$V23
P1.04: U1.P$U24
P1.05: U1.P$T23
P1.06: U1.P$R24
P1.07: U1.P$P23
P1.09: U1.P$R1
P1.10: U1.P$A20
P1.11: U1.P$B19
P1.12: U1.P$B17
P1.13: U1.P$A16
P1.14: U1.P$B15
P1.15: U1.P$A14
PMIC_INT: IC1.A1 U1.P$T2
PREVGH: D5.1 EPD_C9.1 J1.21
PREVGL: D2.2 EPD_C11.1 J1.23
RESE: J1.3 Q3.2 R1_EP_DR.2
RESET: J2.6 TP_RESET.TP U1.P$AC13
SCK: J1.13 U1.P$A12
SCL: IC1.B1 IC2.C1 IC3.12 R4.1 R17.2 TP_SCL.TP U1.P$M2 U3.7
SDA: IC1.C1 IC2.B2 IC3.2 R2.1 R18.2 TP_SDA.TP U1.P$L1 U3.8
SWDCLK: J2.4 TP_SWDCLK.TP U1.P$AA24
SWDIO: J2.2 TP_SWDIO.TP U1.P$AC24
SWO: TP_SWO.TP U1.P$AD22
VBAT: C27.2 C37.2 IC1.C2 TP_VBAT.TP U3.2 U3.3
VBUS: C21.1 C38.2 C42.1 C43.1 D3.5 IC1.A2 J4.A4_B9 J4.A9_B4 U1.P$AD2
VREG: C23.2 C24.2 C39.2 IC1.B2 IC9.A1 IC9.A2 IC9.A3 TP_VREG.TP

## Tracks (layer width: path | path; a pad name or v marks a point on that pad's centre or on a via)
3V3  (via drill 0.15, 0.35)
  Top 0.15: IC2.C2 19.65,8.43 19.98,8.76 20.62,8.76 v21.43,9.57 | C34.2 30.21,3.22 | U1.P$W1 23.83,16.12 U1.P$Y2
  Top 0.3: R5.2 30.7,3.7 v30.7,2.73 | 8.85,4.13 R7.2 9.13,4.28 9.13,4.42 9.41,4.69 9.82,4.69 10.35,5.23 11.56,5.23 11.73,5.39 11.73,5.55 11.87,5.69 | 8.85,4.13 8.44,4.13 7.84,4.73 | 8.85,4.13 8.85,3.43 | 8.85,3.43 C33.1 8.43,2.13 8.01,2.13 7.8,1.92 C25.2 | 11.87,5.69 R17.1 | R18.1 11.73,6.23 11.73,5.83 11.87,5.69 | R8.2 20.04,3.2 v19.64,2.8 | v5.71,6.58 5.17,6.04 IC9.E2 IC9.E3 4.77,5.8 4.26,6.31 2.13,6.31 TP_3V3.TP | 7.84,4.73 7.16,5.4 v7.16,5.77 | U1.P$A22 29.08,21.88 29.43,22.23 30.63,22.23 30.89,22.49 30.89,22.55 31.33,22.55 | J2.1 41.41,9.58 41.41,8.2 41.32,8.1 41.32,3.82 v41.85,3.29 42.73,3.29 TP_3.3V.TP | 31.33,22.55 C14.1 31.75,24.11 31.75,24.16 31.91,24.32 34.72,24.32 38.11,27.71 38.64,27.71 Q1.2 41.41,30.26 C7.1 | U1.P$AD23 29.58,13.88 29.89,13.57 v29.89,13.11 29.89,12.66 30.9,11.65 30.9,11.41 C8.1 31,9.72 30.71,9.44 30.71,9.3 R_PWR_EPD.2 30.19,9.15 28.88,7.84 v28.88,7.13 28.88,7.38 27.37,8.89 27.37,10.29 28.27,11.19 28.27,13.65 27.2,14.71 27.2,14.75 U1.P$AD14 | IC3.3 17.37,11.44 17.37,10.68 17.2,10.52 17.1,10.52 16.55,9.98 v16.55,9.73 | IC3.7 18.49,13.62 18.49,13.86 v18.61,13.97 | C6.1 30.7,2.07 | 30.7,2.07 v30.7,2.73 | 30.21,3.22 v30.7,2.73 | C19.1 29.96,2.73 v30.7,2.73 | C12.1 31.54,22.48 31.48,22.48 31.4,22.55 31.33,22.55 | IC3.10 16.45,13.08 16.45,13.36 v17.37,14.27 | v7.81,5.14 7.84,5.11 7.84,4.73 | 30.7,2.07 30.78,1.99 v30.78,0.95 | 8.85,3.43 8.19,3.43 v8.11,3.35
  Route15 0.152: U1.P$Y2 23.98,16.02
  Route15 0.3: v19.64,2.8 19.64,2.88 | 19.64,2.88 21.87,5.11 v21.9,5.11 | v28.88,7.13 28.88,5.64 31.09,3.43 31.29,3.43 | 31.29,3.43 41.71,3.43 v41.85,3.29 | 17.21,14.19 17.21,9.5 16.92,9.21 | 18.49,14.11 18.49,9.59 18.11,9.21 | 17.21,14.19 18.41,14.19 18.49,14.11 | 16.92,9.21 17.07,9.21 17.25,9.38 17.79,9.38 17.97,9.21 18.11,9.21 | U1.P$B1 23.04,20.33 23.04,17.33 22.8,17.09 22.8,16.63 23.05,16.39 23.05,16.09 v23.12,16.02 23.98,16.02 | v16.55,9.73 16.55,9.57 16.92,9.21 | 18.11,9.21 18.47,9.21 18.87,8.81 | 18.49,14.11 18.61,14 v18.61,13.97 | 17.21,14.19 17.29,14.27 v17.37,14.27 | v21.43,9.57 20.67,8.81 18.87,8.81 | U1.P$A22 28.92,21.53 28.55,21.53 | 28.55,21.53 25.54,21.53 25.36,21.35 24.06,21.35 U1.P$B1 | U1.P$B1 23.58,20.94 22.77,21.75 20.05,21.75 19.08,20.78 16.6,20.78 14.21,18.39 14.21,9.39 14.35,9.26 14.35,8.46 16.24,6.57 17.72,6.57 18.87,7.72 18.87,8.81 | v30.78,0.95 30.78,2 31.34,2.56 31.34,3.38 31.29,3.43 | 28.55,21.53 28.8,21.78 28.8,22.1 30.16,22.1 31.25,21.01 31.25,14.47 v29.89,13.11 | v8.11,3.35 9.74,3.35 9.82,3.43 19.09,3.43 19.64,2.88
  Bottom 0.3: v5.71,6.58 6.12,6.58 6.93,5.77 v7.16,5.77 | v21.9,5.11 21.84,5.17 21.84,6.78 21.79,6.83 21.79,9.21 v21.43,9.57
  other vias: 24.08,16.12 23.58,20.87 29.08,21.37
ALERT  (via drill 0.35)
  Top 0.15: v32.84,12.99 32.52,12.67 32.52,9.97 31.32,8.77 U3.5 | U1.P$J24 30.81,18.87 30.95,18.73 32.86,18.73 v33.8,17.79
  Bottom 0.15: v33.8,17.79 32.84,16.83 v32.84,12.99
D+
  Top 0.15: U1.P$AD6 24.28,14.07 22.27,14.07 21.22,15.13 21.22,16.56 21.32,16.66 21.32,23.14 D3.4
D-
  Top 0.15: U1.P$AD4 24.58,14.84 24.13,14.39 22.74,14.39 21.5,15.64 21.5,16.17 21.66,16.33 21.66,20.94 22.82,22.1 D3.6
DN
  Top 0.152: J4.B7 23.9,29.12 23.9,29.63 24.8,30.54 24.8,33.04 24.25,33.59 23.01,33.59 22.75,33.33 J4.A7 22.9,28.83 22.9,26.12 D3.1
DP  (via drill 0.35)
  Top 0.152: J4.A6 23.25,30.85 v23.81,31.41 | v22.06,32.06 21.56,31.56 21.56,30.18 22.1,29.63 22.1,29.12 J4.B6 22.25,27.95 22.39,27.81 22.39,27.43 21.8,26.84 21.49,26.84 21.37,26.72 21.37,26.49 D3.3
  Bottom 0.152: v23.81,31.41 23.16,32.06 v22.06,32.06
EPD_3V3  (via drill 0.35)
  Top 0.3: Q1.3 38.98,31.1 38.88,31.1 36.97,29.18 v36.64,29.18 | v18.94,20.09 17.27,21.76 L5.2 18.52,21.8 v18.82,21.8 | J1.16 J1.15 12.79,16.25 EPD_C5.1 12.84,15.37 C1-EP-DR.1
  Top 0.35: C1-EP-DR.1 13.94,14.26 v15.51,14.26
  Route15 0.3: v36.64,29.18 35.94,29.18 29.4,22.64 26.76,22.64 26.2,22.08 25.46,22.08 25.06,22.48 19.5,22.48 v18.82,21.8
  Route15 0.35: v18.94,20.09 18.94,19.93 18.86,19.84 18.86,17.61 v15.51,14.26
EPD_BUSY  (via drill 0.35)
  Top 0.15: J1.9 10.77,19.4 11.06,19.4 11.35,19.69 v12.76,19.69 | U1.P$AD12 26.61,14.84 26.61,12.6 v26.87,12.34 | v21.37,13.66 v21.37,13.65 v22.63,12.39
  Bottom 0.15: v26.87,12.34 26.48,12.34 26.45,12.38 24,12.38 24,12.39 v22.63,12.39 | v21.37,13.66 18.94,13.66 18.79,13.52 18.42,13.52 18.04,13.89 18.04,14.41 v12.76,19.69
EPD_CS  (via drill 0.15, 0.35)
  Top 0.15: J1.12 12.51,17.75 12.54,17.72 15.91,17.72 16.84,18.65 16.07,19.43 16.64,20.01 16.97,20.01 17.76,19.23 v18.17,19.23
  Bottom 0.15: U1.P$K2 23.24,17.78 22.99,17.78 19.3,17.78 18.21,18.87 18.21,19.19 v18.17,19.23
  other vias: 24.08,18.62
EPD_DC  (via drill 0.35)
  Top 0.15: U1.P$AD10 26.08,13.18 26.29,12.97 26.29,10.59 v26.5,10.38 | v12.73,18.17 12.65,18.25 J1.11 | v21.22,11.9 21.98,11.14 v22.63,11.14
  Bottom 0.15: v26.5,10.38 25.99,10.89 22.88,10.89 v22.63,11.14 | v21.22,11.9 20.41,12.71 20.41,12.78 20.15,13.04 17.95,13.04 12.83,18.17 v12.73,18.17
EPD_RST  (via drill 0.15, 0.35)
  Top 0.15: J1.10 15.44,18.75 v15.87,18.32 | v21.96,15.82 22.66,15.13 v23.14,15.13
  Bottom 0.15: v23.14,15.13 23.14,13.64 24.12,12.66 25.41,12.66 26.33,13.58 U1.P$AC11 | v15.87,18.32 16.05,18.32 18.68,15.69 21.82,15.69 v21.96,15.82
  other vias: 26.33,15.37
GDR
  Top 0.15: J1.2 10.48,22.9 10.19,22.9 9.9,23.19 9.9,26.18 8.75,27.33 8.71,27.33 R2_EP_DR.2 8.74,27.8 Q3.1
GND  (via drill 0.35)
  Top 0.15: 38.53,25.8 C3.2 | 39.49,25.81 C4.2 | 41.16,11.11 J2.3 | IC9.C3 IC9.C2 IC9.C1 IC9.B1 | 0.64,9.97 C39.1 | 41.42,20.66 X1.4 41.61,20.63 | C12.2 32.32,22.22 32.32,23.68 C14.2 | X1.2 42.77,19.48 | IC2.B1 21.31,6.73 v21.31,6.56
  Top 0.3: R_TYPE_SEL.1 13.59,20.7 EPD_C1.2 | EPD_C9.2 13.76,10.04 EPD_C8.2 14.05,10.34 R3.1 | 31.95,7.41 U3.4 | U3.6 30.69,6.91 U3.9 31.27,6.33 31.27,6.18 31.54,5.91 U3.1 | C2.2 41.83,21.06 41.42,20.66 | J4.A1_B12 26.77,29.55 J4.SH3 | U1.P$B7 25.33,20.22 U1.P$75 | U1.P$F23 28.93,19.62 U1.P$78 | U1.P$74 U1.P$80 | J4.SH4 19.23,29.55 J4.A12_B1 | v35.57,5.43 38.2,2.8 TP_GND.TP | 41.61,20.63 42.14,20.11 42.14,20.09 42.75,19.48 42.77,19.48 | v39.3,25 40.13,25 42.02,23.1 43.65,23.1 45.57,21.18 45.57,18.26 41.84,14.53 41.18,14.53 40.66,14.01 40.66,13.28 41.16,12.77 J2.5 41.16,11.12 41.16,11.11
  Route2 0.15: v21.31,6.56 23.05,4.81 v24.7,4.81
  other vias: 5.82,7.86 6.79,4.5 14.9,4.63 0.65,8.62 35.83,20 40.59,22.83 21.94,27.62 8.1,0.67 37.14,25.06 29.37,11.81 23.91,11.47 39.34,20.83 11.62,9.93 33.39,11 22.38,19.41 11.49,8.77 12.33,8.06
  pour Route2: 48.18,28.03 48.81,28.66 48.81,39.2 48.83,39.22 50.06,40.45 0.86,40.45 -2.11,37.48 -2.11,-4.49 50.04,-4.49 48.64,24.53 41.13,24.53 41.11,24.55 40.84,24.82 40.82,24.84 40.82,27.86 40.78,27.91 40.76,27.93 40.76,27.97 40.78,27.99 40.8,28.01 40.82,28.03
  pour Top: 40.81,24.84 40.79,24.86 40.79,27.98 40.81,28 41.02,28.21 41.04,28.23 46.4,28.23 48.63,30.46 48.63,38.52 0.16,38.52 -1.63,36.73 -1.63,-1.25 0.2,-3.08 48.63,-3.08 48.54,24.52 41.13,24.52 41.11,24.54
  pour Bottom: 41.1,24.43 41.08,24.45 40.87,24.66 40.85,24.68 40.85,27.59 40.67,27.78 40.65,27.8 40.65,27.84 40.67,27.86 40.69,27.88 40.71,27.9 50.51,27.9 50.76,28.15 50.76,41.35 0.41,41.35 -2.84,38.1 -2.84,-6.09 50.76,-6.09 51,24.43
HAPTIC_EN  (via drill 0.15)
  Route2 0.15: IC2.A1 22.05,9.37 22.05,14.9 22.54,15.39 22.54,16.26 23.15,16.87 U1.P$U1
  other vias: 20.11,7.43 23.58,16.87
IMU_INT1  (via drill 0.35)
  Top 0.15: IC3.5 18.05,11.83 18.11,11.83 18.23,11.71 18.23,10.78 18.69,10.32 20.45,10.32 20.6,10.47 20.6,16.58 v20.87,16.85 | U1.P$N1 23.12,17.87 v22.16,16.91 v22.15,16.91
  Bottom 0.15: v20.87,16.85 22.09,16.85 v22.15,16.91
IMU_INT2  (via drill 0.15, 0.35)
  Top 0.15: IC3.6 18.05,12.33 18.16,12.33 18.99,11.51 19.15,11.51 19.15,16.12 v19.19,16.16
  Bottom 0.15: v19.19,16.16 19.35,16.32 22.31,16.32 23.22,17.22 23.48,17.22 23.87,17.62 U1.P$P2
  other vias: 24.08,17.62
LX1
  Top 0.15: IC9.B2 IC9.B3 3.34,3.83 L7.1
LX2
  Top 0.15: IC9.D2 IC9.D3 4.72,4.68 3.63,4.68 L7.2
MOSI  (via drill 0.15, 0.35)
  Top 0.15: J1.14 10.74,16.86 17,16.86 v19.54,19.4
  Bottom 0.15: v19.54,19.4 21.2,19.4 25.25,23.44 25.94,23.44 26.83,22.55 U1.P$B13
  other vias: 26.83,20.87
N$1
  Top 0.15: R9.2 13.82,8.13 IC1.D1
N$3
  Top 0.15: R3.2 14.99,9.79 16.38,11.18 IC3.1
N$4
  Top 0.15: IC9.D1 5.66,4.72 5.7,4.72 6.59,5.61 6.59,5.84 7.3,6.55 R4.2
N$5
  Top 0.15: C9.2 30.64,17.24 30.08,17.8 U1.P$N24
N$6
  Top 0.15: IC9.E1 6.31,5.77 6.31,7.35 6.95,8 R2.2
N$7
  Top 0.15: J1.18 10.77,14.6 12.55,14.6 13.73,13.43 EPD_C6.1
N$8  (via drill 0.15, 0.35)
  Top 0.15: C20.1 24.32,13.22 v24.32,13.28
  Bottom 0.15: U1.P$AC5 24.73,15.27 24.73,13.69 v24.32,13.28
  other vias: 24.83,15.37
N$9
  Top 0.15: C13.1 U1.P$A18
N$11
  Top 0.15: U1.P$D23 30.03,20.57 30.2,20.57 30.39,20.75 C11.1
N$12  (via drill 0.35)
  Top 0.15: L2.1 v33.65,21.96 v33.65,21.95 | v27.88,23.89 26.33,23.89 25.88,23.44 25.42,23.44 24.33,22.35 U1.P$B3
  Bottom 0.15: v27.88,23.89 29.83,21.95 v33.65,21.95
N$13
  Top 0.15: L3.1 39.62,22.04 L2.2
N$14  (via drill 0.15, 0.35)
  Top 0.15: U1.P$E24 33.98,19.87 C10.1 32.29,19.94 31.83,19.48 v38,19.48 | L3.2 38.23,22.95 37.55,22.95 | v34.95,22.52 35.53,22.52 C16.1 37.55,22.95 | 37.55,22.95 C15.1 | U1.P$B5 v24.83,21.93
  Bottom 0.15: v38,19.48 v34.96,22.52 v34.95,22.52 | U1.P$E24 29.42,20.53 27.18,20.53 27.17,20.52 26.49,20.52 26.48,20.53 26.23,20.53 v24.83,21.93
  other vias: 30.08,19.87
N$15
  Top 0.15: U1.P$A23 33.62,21.37 33.7,21.44 40.72,21.44 41.61,22.34 C2.1 42,22.17 42.13,22.17 42.89,21.4 X1.3
N$16
  Top 0.15: U1.P$B24 30.27,21.06 33.7,21.06 33.81,21.17 36.45,21.17 36.97,20.64 C1.1 40.16,19.45 40.19,19.48 X1.1
N$17
  Top 0.15: C3.1 L1.1 38.03,27.13 37.59,26.69 37.59,25.78 39.29,24.09 40.54,24.09 41.88,22.75 42.05,22.75 45.17,19.64 45.17,19.25 44.27,18.35 34.5,18.35 33.85,19.01 31.07,19.01 30.9,19.17 29.95,19.17 29.9,19.12 U1.P$H23
N$18
  Top 0.15: ANT1.1 41.75,26.37 C22.1 40.37,26.36 C4.1 L1.2
N$19
  Top 0.15: L5.1 15.09,29.8 C2-EP-DR.2 14.34,31.23 | 14.34,31.23 14.13,31.44 D5.2 | Q3.3 8.06,31.23 14.34,31.23
N$20  (via drill 0.35)
  Top 0.15: D4.2 13.69,27.84 C2-EP-DR.1 13.54,30.33 v11.46,30.33 | v9.19,32.41 9.07,32.53 D2.1
  Bottom 0.15: v9.19,32.41 11.25,30.35 11.44,30.35 v11.46,30.33
N$21
  Top 0.15: SJ1.2 13.09,23.4 R1_EP_DR.1 13.26,21.88 13.26,21.93 13.38,22.05 13.79,22.05 13.91,21.93 13.91,21.89 R_TYPE_SEL.2
N$22
  Top 0.15: J4.B5 21.1,28.83 21.1,28.32 21.08,28.29 R2_USB.1
N$23
  Top 0.15: X2.2 25.76,24.62 C18.2 25.42,24.28 25.42,24.15 25.26,23.99 24.54,23.99 23.34,22.79 23.34,21.96 22.48,21.1 22.28,21.1 21.93,20.75 21.93,19.22 22.37,18.78 22.56,18.78 23.45,19.67 23.7,19.67 23.76,19.62 U1.P$F2
N$24
  Top 0.15: U1.P$D2 24.08,20.69 24.03,20.75 24.03,23.09 24.66,23.72 25.76,23.72 26.55,24.5 C17.2 28.26,25.02 X2.1
N$25
  Top 0.15: J1.19 10.77,14.1 11.06,14.1 11.69,13.47 EPD_C7.1
N$26
  Top 0.15: U1.P$C1 23.13,20.38 22.81,20.7 C5.1
N$27  (via drill 0.35)
  Top 0.15: IC2.A2 19.61,7.38 20.41,6.58 v20.41,6.56 | v19.56,1.18 19.43,1.05 C32.2
  Bottom 0.15: v20.41,6.56 20.41,4.85 18.51,2.95 18.51,2.23 v19.56,1.18
N$28
  Top 0.15: J1.4 10.48,21.9 10.19,21.9 8.68,23.41 8.68,24.27 6.62,26.33 EPD_C2.1
N$29
  Top 0.15: J1.5 10.77,21.1 11.06,21.1 11.48,20.68 EPD_C1.1
N$31
  Top 0.15: R1_USB.2 24.27,28.95 J4.A5
N$33
  Top 0.15: EPD_C8.1 13.02,11.9 12.39,11.9 12.2,12.09 12.2,12.46 10.91,13.75 J1.20
N$34
  Top 0.15: J1.22 10.77,12.6 11.06,12.6 11.45,12.21 11.45,11.4 9.68,9.63 9.68,9.22 EPD_C10.1
N$35
  Top 0.15: EPD_C12.1 4.5,10.25 7.68,10.25 8.04,10.61 8.56,10.61 9.7,11.75 J1.24
OUT+  (via drill 0.35)
  Top 0.15: v19.25,6.56 19.11,6.7 IC2.A3 | v19.16,4.74 18.13,3.71 TP_OP.TP
  Bottom 0.15: v19.25,6.56 19.25,4.83 v19.16,4.74
OUT-  (via drill 0.35)
  Top 0.15: v17.75,4.6 15.7,2.55 TP_ON.TP | IC2.C3 19.11,9.43 v19.14,9.46
  Bottom 0.15: v19.14,9.46 17.75,8.07 v17.75,4.6
P0.13
  Top 0.15: C30.2 33.97,4.87 33.22,4.87 33.1,4.75 33.1,4.47 SW_UP.2 32.53,4.04 31.64,4.04 | 31.64,4.04 R5.1 | 31.64,4.04 31.42,4.26 31.42,4.28 31.34,4.36 31.31,4.36 31.25,4.42 30.84,4.42 30.09,3.67 26.48,3.67 25.79,4.36 25.79,4.37 24.39,5.77 24.04,5.77 23.77,6.04 23.77,8.08 26.01,10.32 26.01,12.86 25.8,13.06 25.8,14.65 U1.P$AD8
P0.14  (via drill 0.15, 0.35)
  Top 0.15: R8.1 20.6,3.82 21.58,3.82 | 21.58,3.82 SW_ENT.2 | 21.58,3.82 22.1,4.34 22.1,4.6 22.22,4.72 23.15,4.72 C31.2 23.45,8.7 25.73,10.98 25.73,12.74 25.31,13.16 v25.31,13.78
  Bottom 0.15: U1.P$AC9 25.14,14.68 25.14,13.95 v25.31,13.78
  other vias: 25.83,15.37
P1.01  (via drill 0.35)
  Top 0.15: Q1.1 38.38,29.35 v38.38,28.6 | U1.P$Y23 29.58,15.37 29.93,15.02 29.93,14.35 31.39,12.89 | 31.39,12.89 v31.39,12.14 | R_PWR_EPD.1 32.24,10.28 32.24,12.04 31.39,12.89
  Bottom 0.15: v31.39,12.14 32.83,12.14 32.84,12.13 38.45,17.75 38.45,19.67 36.28,21.84 36.28,28.29 36.59,28.6 v38.38,28.6
P1.02  (via drill 0.35)
  Top 0.15: 10.64,4.01 11.1,4.47 11.1,4.75 11.22,4.88 12.99,4.88 C29.2 13.32,5.21 13.32,5.35 13.44,5.47 21.5,5.47 23.18,7.14 23.18,10.15 v23.21,10.15 | 10.64,4.01 SW_DN.2 | R7.1 10.52,4.13 10.64,4.01 | v35.21,13.27 32.33,16.15 30.3,16.15 U1.P$W24
  Bottom 0.15: v35.21,13.27 35.21,9.5 34.03,8.32 25.04,8.32 v23.21,10.15
PMIC_INT  (via drill 0.15, 0.35)
  Top 0.15: v17.52,8.73 16.34,8.73 16.16,8.55 16.09,8.55 IC1.A1
  Bottom 0.15: v17.52,8.73 20.24,11.45 21.41,11.45 21.67,11.71 21.67,12.88 22.66,13.87 22.66,16.24 22.91,16.49 23.71,16.49 24.08,16.86 U1.P$T2
  other vias: 24.08,17.12
PREVGH  (via drill 0.35)
  Top 0.15: J1.21 10.77,13.1 11.06,13.1 11.73,12.43 11.73,11.98 EPD_C9.1 11.58,11.04 10.55,10.01 v10.55,9.39 | D5.1 10,33.63 v6.96,33.63
  Bottom 0.15: v6.96,33.63 7.63,32.96 7.63,12.31 v10.55,9.39
PREVGL  (via drill 0.35)
  Top 0.15: v5.4,27.26 4.66,28 D2.2 4.25,29.44 EPD_C11.1 | J1.23 10.77,12.1 11.06,12.1 11.18,11.98 11.18,11.52 11.06,11.4 9.74,11.4 8.67,10.33 8.62,10.33 7.68,9.39 v7.37,9.39
  Bottom 0.15: v5.4,27.26 5.4,26.96 7.35,25 7.35,9.41 v7.37,9.39
RESE
  Top 0.15: J1.3 10.77,22.1 11.06,22.1 11.45,21.71 R1_EP_DR.2 11.86,22.39 11.86,24.79 9.35,27.3 9.35,29.13 9.09,29.39 Q3.2
RESET  (via drill 0.15, 0.35)
  Top 0.15: J2.6 39.48,12.37 38.61,13.24 37.3,13.24 v36.05,14.5 34.42,16.12 TP_RESET.TP
  Bottom 0.15: U1.P$AC13 27.24,15.37 28.79,13.82 28.79,11.22 30.29,9.72 30.87,9.72 35.64,14.5 v36.05,14.5
  other vias: 26.83,15.37
SCK  (via drill 0.35)
  Top 0.15: U1.P$A12 26.51,21.37 25.82,22.05 v25.82,22.78 | J1.13 15.83,17.25 17.12,18.54 17.12,19.22 v16.91,19.43
  Bottom 0.15: v16.91,19.43 17.15,19.68 18.4,19.68 19.19,18.89 23.3,18.89 24.3,19.89 24.3,21.89 25.18,22.78 v25.82,22.78
SCL  (via drill 0.15, 0.35)
  Top 0.15: R17.2 9.58,5.68 TP_SCL.TP 8.56,5.97 R4.1 7.76,6.77 7.76,6.81 7.42,7.15 v7.42,7.35 | 21.91,8.22 v22.6,8.22 | 21.91,8.22 20.32,8.22 IC2.C1 | 21.91,8.22 22.25,8.56 22.25,9.39 21.62,10.02 17.52,10.02 16.6,9.11 15.75,9.11 v15.45,8.8 15.38,8.74 15.25,8.74 14.98,8.46 14.98,7.84 IC1.B1 | v24.52,8.01 24.52,7.99 27.07,5.45 28.71,5.45 29.51,6.25 29.79,6.25 U3.7 | IC3.12 15.52,11.98 v14.87,11.33 | v21.13,14.55 21.39,14.55 23.08,12.86 23.08,10.95 22.69,10.56 v21.24,10.56
  Bottom 0.15: v24.52,8.01 24.52,8.05 24.36,8.22 v22.6,8.22 22.6,9.2 v21.24,10.56 | v14.87,11.33 15.75,10.45 15.75,9.11 | 15.75,9.11 14.79,9.11 13.37,7.68 12.64,7.68 12.32,7.35 v7.42,7.35 | v21.13,14.55 18.3,14.55 13.41,19.43 13.41,19.75 13.67,20.01 14.3,20.01 14.84,19.47 15.51,19.47 17.55,17.43 17.57,17.41 23.01,17.41 23.1,17.5 23.36,17.5 23.98,18.12 U1.P$M2 | 15.75,9.11 v15.45,8.8
  other vias: 24.08,18.12
SDA  (via drill 0.15, 0.35)
  Top 0.15: R2.1 TP_SDA.TP 10.13,6.92 10.13,6.84 10.39,6.57 11.48,6.57 12.11,7.2 12.15,7.2 R18.2 12.19,7.6 12.14,7.6 11.88,7.87 11.88,8.24 12.07,8.44 12.07,9.18 12.34,9.46 15.05,9.46 15.07,9.48 15.08,9.48 | U3.8 29.14,5.1 26.23,5.1 25.02,6.31 25.02,6.68 v24.86,6.84 | 15.08,9.48 16.17,10.58 16.65,10.58 16.79,10.72 16.79,11.37 IC3.2 | 15.08,9.48 14.61,9.01 14.55,8.96 IC1.C1 14.45,7.91 14.45,7.94 13.69,8.7 v13.69,8.99 | v22.61,7.32 21.54,7.32 v21.26,7.6 | v19.71,12.22 19.71,17.38 19.7,17.39 19.7,18.15 v19.54,18.32 | U1.P$L1 23.44,18.23 v22.39,18.23
  Bottom 0.15: v24.86,6.84 24.38,7.32 v22.61,7.32 | v21.26,7.6 21,7.6 20.67,7.93 IC2.B2 18.51,6.83 18.51,4.21 18.11,3.81 17.47,3.81 16.97,4.31 16.97,5.28 14.85,7.4 12.76,7.4 11.74,6.38 7.15,6.38 6.73,6.8 6.73,8.22 7.32,8.81 10.88,8.81 11.3,9.23 11.68,9.23 11.77,9.14 13.49,9.14 13.64,8.99 | v19.71,12.22 14.34,12.22 14.34,9.38 13.95,8.99 13.64,8.99 | v19.54,18.32 22.3,18.32 v22.39,18.23 | 13.64,8.99 v13.69,8.99
  other vias: 19.61,7.93
SWDCLK
  Top 0.15: J2.4 39.66,10.87 39.25,10.87 38.61,10.24 37.37,10.24 36.79,10.81 | TP_SWDCLK.TP 36.79,10.81 | U1.P$AA24 31.73,15.87 36.79,10.81
SWDIO
  Top 0.15: 38.1,7.06 38.61,7.06 39.49,7.94 39.49,9.43 J2.2 | TP_SWDIO.TP 38.1,7.06 | 38.1,7.06 37.37,7.06 34.36,10.07 34.36,12.65 31.64,15.37 U1.P$AC24
SWO
  Top 0.15: TP_SWO.TP 28.63,9.44 28.63,14.42 U1.P$AD22
VBAT  (via drill 0.35)
  Top 0.15: C37.2 C27.2 34.09,8.03 34.09,6.91
  Top 0.3: v24.23,6.22 24.25,6.25 24.46,6.25 25.96,4.75 29.29,4.75 29.31,4.77 31.67,4.77 32.58,5.68 32.58,6.14 32.38,6.34 32,6.34 U3.2 U3.3 34.09,6.91 TP_VBAT.TP | IC1.C2 14.53,7.39 14.53,7.25 14.24,6.97 13.54,6.97 v13.34,6.77
  Route15 0.3: v24.23,6.22 23.79,5.79 14.52,5.79 13.54,6.77 v13.34,6.77
VBUS  (via drill 0.15, 0.35)
  Top 0.15: C38.2 30.27,29.44 C43.1 30.23,28.39 C42.1
  Top 0.152: J4.A4_B9 25.1,29.27 25.1,29.63 25.1,29.64 25.1,33.33 24.2,34.23 22,34.23 20.74,32.97 20.74,29.79 20.6,29.65 J4.A9_B4
  Top 0.3: J4.A4_B9 25.4,28.27 25.23,28.1 25.23,27.74 25.4,27.57 28.4,27.57 C43.1 30.65,29.82 30.65,29.87 32.24,31.45 C21.1 | IC1.A2 16.9,7.41 v16.93,7.44 | 20.34,25.32 20.34,26.76 20.6,27.01 J4.A9_B4 | D3.5 21.5,23.91 21.5,24.25 21.34,24.42 21.25,24.42 20.34,25.32 | 20.34,25.32 20.34,20.32 v20.21,20.19
  Route15 0.3: v16.93,7.44 16.93,8.24 15.56,9.61 15.56,13.39 17.38,15.21 20.71,15.21 | U1.P$AD2 24.08,14.21 23.87,14 22.92,14 21.71,15.21 20.71,15.21 | v20.21,20.19 20.21,15.71 20.71,15.21
  other vias: 24.08,14.87
VREG  (via drill 0.35)
  Top 0.15: IC1.B2 14.95,6.2 | C23.2 5.3,9.3 5.16,9.3 4.66,8.79 3.8,8.79
  Top 0.3: v6.84,3.25 5.75,3.25 IC9.A1 IC9.A2 IC9.A3 4.26,2.92 4.26,2.66 3.55,1.95 v3.55,1.72 3.59,1.76 TP_VREG.TP | v4.71,7.31 4.06,7.96 C24.2 4.07,8.54 3.8,8.79 v3.78,8.82 | C39.2 2.06,9.49 v2.06,9.01 | 14.95,6.2 v12.54,6.2
  Route15 0.3: v6.84,3.25 9.79,6.2 v12.54,6.2
  Bottom 0.3: v4.71,7.31 3.55,6.16 v3.55,1.72 | v3.78,8.82 2.25,8.82 v2.06,9.01